# Altium PCB USB2aer_def.PCBDOC (part 3 of 3)
Units mm, origin at the board's own origin, x right, y up, seen from the top; angles counter-clockwise.
Board outline 194.75 x 143.65 mm, 2 copper layers (TopLayer, BottomLayer); 106 components, 195 nets, 863 pads, 225 vias.
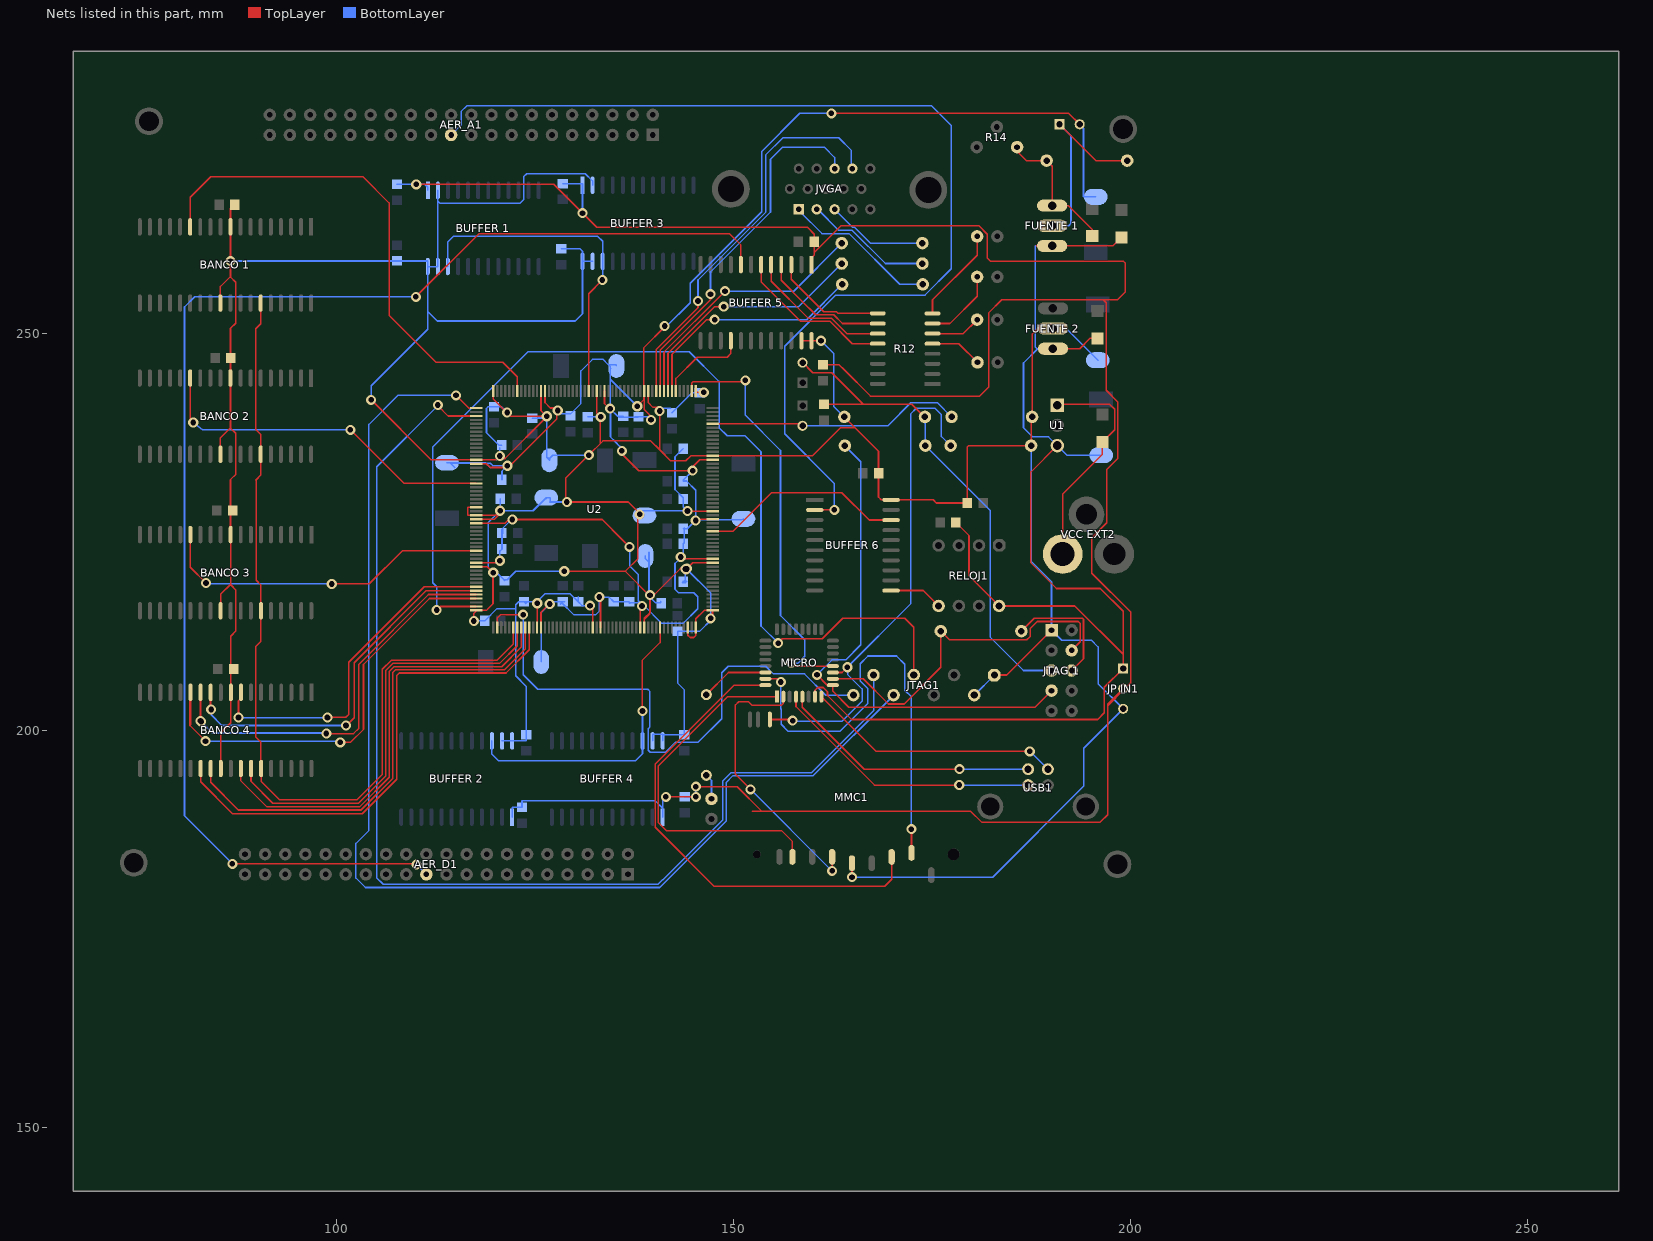
[diagram p3: the nets of this part, all layers, seen from the top]

## Via types
v1: diameter 1.27, hole 0.711, TopLayer to BottomLayer, 225 vias

## Nets (pads, with @x,y where several pads share a name; then routed paths per layer and width w, separated by ;. In a path a pad name is that pad's centre, name@x,y a point inside that pad or via, vN(x,y) a via of type N, cw(c..) or ccw(c..) an arc to the next point about the centre after c; other vN are vias at no path point) (continued)
MEM_D25: "BANCO 4.8" U2.202 | length 44.1
  TopLayer w0.203: v1(87.625,201.625) 87.625,203.725 87.931,204.031 87.931,204.797 ; v1(98.831,201.607) 98.831,201.644 v1(98.825,201.65) 98.831,201.65 101.15,201.65 101.5,202 101.5,208.575 111.041,218.116 U2.202@117.595,218.116
  BottomLayer w0.2: v1(98.825,201.65) 98.825,201.607 98.825,201.6 v1(98.831,201.607)
  BottomLayer w0.203: v1(87.625,201.625) 98.825,201.6 98.831,201.6 v1@98.85,201.6
MEM_D26: "BANCO 4.11" U2.203 | length 63.1
  TopLayer w0.203: 84.1,204.925 84.1,204.797 84.1,202.7 v1(84.175,202.625) ; v1(101.168,200.609) 101.177,200.6 101.2,200.6 102.2,201.6 102.2,208.525 111.291,217.616 U2.203@117.595,217.616
  BottomLayer w0.2: 84.175,201.975 85.525,200.625 v1(101.15,200.625) ; v1@101.15,200.6 101.159,200.609 v1(101.168,200.609)
  BottomLayer w0.203: 85.55,200.6 101.15,200.6 101.168,200.6 v1@101.2,200.6
MEM_D27: "BANCO 4.12" U2.204 | length 51.5
  TopLayer w0.203: 82.83,204.925 82.83,204.797 v1(82.83,201.195) v1(82.925,201.1) ; v1(98.704,199.604) v1(98.7,199.6) 98.704,199.6 102.125,199.6 102.8,200.275 102.8,208.35 111.566,217.116 U2.204@117.595,217.116
  BottomLayer w0.2: v1(82.83,201.195) v1(82.925,201.1) ; v1(98.7,199.6) 98.7,199.604 98.7,199.675 v1@98.704,199.671
  BottomLayer w0.203: v1(82.925,201.1) 84.35,199.675 98.7,199.675 98.704,199.675 v1@98.8,199.675 ; v1(98.704,199.604) v1@98.704,199.671
MEM_D28: "BANCO 4.25" U2.10 | length 63.8
  TopLayer w0.203: 82.851,195.197 82.851,193.526 86.877,189.5 103.225,189.5 107.575,193.85 107.575,206.925 107.878,207.228 121.328,207.228 124.245,210.145 U2.10@124.245,212.966
MEM_D29: "BANCO 4.26" U2.9 | length 61.8
  TopLayer w0.203: 84.121,195.197 84.121,193.454 87.6,189.975 103.1,189.975 103.1,189.997 107.05,193.947 107.05,207.284 107.397,207.631 121.131,207.631 123.745,210.245 ; 123.745,210.215 123.745,210.245 ; U2.9@123.745,212.966 123.745,210.245
MEM_D30: "BANCO 4.29" U2.8 | length 56.8
  TopLayer w0.203: 87.931,195.197 87.931,193.631 91.162,190.4 102.925,190.4 106.625,194.1 106.625,207.429 107.23,208.034 120.784,208.034 123.245,210.495 U2.8@123.245,212.966
MEM_D31: "BANCO 4.30" U2.7 | length 54.6
  TopLayer w0.203: 89.201,195.197 89.201,193.576 91.952,190.825 102.75,190.825 106.2,194.275 106.2,207.574 107.063,208.437 120.512,208.437 122.745,210.67 U2.7@122.745,212.966
MEM_OE: "BANCO 1.31" "BANCO 2.31" "BANCO 3.31" "BANCO 4.31" U2.6 | length 112.6
  TopLayer w0.203: 89.795,231.545 89.845,231.596 ; 90.425,253.85 90.425,251.225 89.795,250.595 89.795,237.925 90.425,237.295 90.425,234.8 90.425,232.175 89.845,231.596 ; U2.6@122.245,212.966 122.245,210.895 120.19,208.84 106.896,208.84 105.75,207.694 105.75,194.45 102.55,191.25 92.8,191.25 90.471,193.579 90.471,195.197 90.471,196.004 90.45,196.025 90.45,198.52 89.82,199.15 89.82,210.595 89.825,210.6 90.45,211.225 90.45,215.075 90.45,218.325 89.845,218.93 89.845,231.596
MEM_WE1: "BANCO 1.13" U2.150 | length 66.5
  TopLayer w0.203: 81.535,263.45 81.535,267.165 84.12,269.75 103.3,269.75 106.6,266.45 106.6,252.306 112.518,246.388 120.912,246.388 122.745,244.555 U2.150@122.745,242.766
MEM_WE2: "BANCO 2.13" U2.176 | length 44.5
  TopLayer w0.203: 81.535,244.4 81.535,239.19 v1(81.925,238.8) ; v1(101.725,237.875) 108.475,231.125 U2.176@117.586,231.125
  BottomLayer w0.203: v1(81.925,238.8) 83.1,237.875 v1(101.725,237.875)
MEM_WE3: "BANCO 3.13" U2.193 | length 58.5
  TopLayer w0.203: 81.56,224.675 81.56,220.54 v1(83.525,218.575) ; v1(99.375,218.45) 99.375,218.475 104.1,218.475 108.241,222.616 U2.193@117.595,222.616
  BottomLayer w0.2: v1(83.525,218.575) 83.635,218.465 v1(99.375,218.45) 99.375,218.475 v1@83.65,218.55
MEM_WE4: "BANCO 4.13" U2.205 | length 57.7
  TopLayer w0.203: 81.51,204.75 81.51,200.615 ; 81.581,204.797 81.581,200.686 81.51,200.615 ; v1(83.475,198.65) 81.51,200.615 ; v1(100.45,198.5) 101.75,198.5 103.375,200.125 103.375,208.3 111.691,216.616 U2.205@117.595,216.616
  BottomLayer w0.2: v1(83.475,198.65) 83.575,198.65 v1@83.6,198.625 ; v1(100.45,198.5) v1@100.45,198.6
  BottomLayer w0.203: v1@83.6,198.625 100.45,198.6 v1@100.525,198.6
"NetBUFFER 5_3": "BUFFER 5.3" R12.9 | length 14.5
  TopLayer w0.203: 157.285,258.7 157.285,256.84 161.365,252.76 162.965,252.76 163.185,252.54 R12.9@168.175,252.54
"NetBUFFER 5_4": "BUFFER 5.4" R12.10 | length 16.4
  TopLayer w0.203: 156.015,258.7 156.015,256.71 158.635,254.09 160.369,252.356 162.644,252.356 163.73,251.27 R12.10@168.175,251.27
"NetBUFFER 5_5": "BUFFER 5.5" R12.11 | length 18.3
  TopLayer w0.203: 154.745,258.7 154.745,256.605 159.397,251.953 162.322,251.953 164.275,250 R12.11@168.175,250
"NetBUFFER 5_6": "BUFFER 5.6" R12.12 | length 20.1
  TopLayer w0.203: 153.475,258.7 153.475,256.525 158.45,251.55 162.15,251.55 164.97,248.73 R12.12@168.175,248.73
"NetBUFFER 6_11": "BUFFER 6.11" RELOJ1.5 | length 6.8
  TopLayer w0.203: 169.85,217.62 173.915,217.62 RELOJ1.5@175.855,215.68
NetC6_1: "JTAG 1.5" C6.1 R4.1 R5.2 RESET1.2 | length 63.8
  TopLayer w0.203: RESET1.2@158.717,246.358 160,245.075 162.375,245.075 165.769,241.681 166.35,241.1 ; C6.1@161.4,241.1 172.475,241.1 R4.1@174.1,239.475
  BottomLayer w0.2: R4.1@174.125,239.5 174.125,238.676 174.185,238.616 R5.2@174.185,235.875 182.372,227.688 182.372,211.711 186.538,207.545 190.075,207.545
"NetC ADJ1_1": "C ADJ1.1" "FUENTE 1.1" R13.1 R14.2 | length 19.6
  TopLayer w0.203: R14.2@185.18,273.525 186.905,271.8 R13.1@189.45,271.8 190.15,271.1 190.15,266.15 ; 190.15,266.125 192.202,266.125 195.2,263.127 195.2,262.3
  BottomLayer w0.2: 188.62,266.125 190.15,266.125
NetD1_A: D1.A R3.1 | length 3.2
  BottomLayer w0.2: R3.1@146.575,194.345 147.225,193.695 D1.A@147.225,191.375
NetD2_A: D2.A R12.5 | length 6.7
  TopLayer w0.203: R12.5@175.075,248.73 178.395,248.73 D2.A@180.75,246.375
NetD3_A: D3.A R12.6 | length 6.3
  TopLayer w0.203: R12.6@175.075,250 178.95,250 D3.A@180.7,251.75
NetD4_A: D4.A R12.7 | length 9.5
  TopLayer w0.203: R12.7@175.075,251.27 177.27,251.27 180.7,254.7 D4.A@180.7,257.15
NetD5_A: D5.A R12.8 | length 12
  TopLayer w0.203: R12.8@175.075,252.54 175.075,254.25 180.7,259.875 D5.A@180.7,262.25
"NetFUENTE 1_2": "FUENTE 1.2" "VCC EXT1.1" R13.2 | length 26
  TopLayer w0.203: 191.075,276.375 195.65,271.8 R13.2@199.61,271.8
  BottomLayer w0.2: 190.15,263.585 192.227,263.585 192.532,263.89 192.532,274.918 191.075,276.375
"NetJTAG 1_4": "JTAG 1.4" MICRO.10 R2.2 | length 44.9
  TopLayer w0.203: MICRO.10@162.525,206.5 166.347,206.5 169.52,203.327 171.501,203.327 176.115,207.941 R2.2@176.115,212.5 177.211,211.404 186.944,211.404 187.376,211.836 187.376,212.827 188.265,213.716 193.446,213.716 193.704,213.458 193.704,211.174 192.615,210.085
"NetJTAG 1_6": "JTAG 1.6" R2.1 | length 15.6
  TopLayer w0.203: R2.1@186.275,212.5 187.897,214.122 193.98,214.122 194.107,213.995 194.107,209.037 192.615,207.545
"NetJTAG 1_7": "JTAG 1.7" MICRO.9 R5.1 | length 65.6
  TopLayer w0.203: v1(160.525,207) 161.825,205.7 MICRO.9@162.525,205.7 162.525,204.922 164.527,202.921 187.991,202.921 190.075,205.005
  BottomLayer w0.2: v1(160.525,207) 162.402,208.877 164.152,208.877 166.05,210.775 166.05,233.85 R5.1@164.025,235.875
NetJVGA_1: JVGA.1 R7.1 | length 19.5
  BottomLayer w0.2: JVGA.1@158.488,265.662 158.488,265.262 161.15,262.6 164.55,262.6 170.947,256.203 R7.1@173.845,256.203
NetJVGA_2: JVGA.2 R8.1 | length 16
  BottomLayer w0.2: JVGA.2@160.613,265.662 163.275,263 164.975,263 169.147,258.828 R8.1@173.795,258.828
NetJVGA_3: JVGA.3 R9.1 | length 12.8
  BottomLayer w0.2: JVGA.3@162.738,265.662 165,263.4 165.25,263.4 167.247,261.403 R9.1@173.795,261.403
NetMICRO_1: MICRO.1 MMC1.7 | length 45.5
  TopLayer w0.203: MICRO.1@155.475,204.25 149.234,204.25 140.538,195.555 140.538,188.366 141.529,187.376 156.058,187.376 157.425,186.008 MMC1.7@157.425,184.065
NetMICRO_2: MICRO.2 MMC1.5 | length 35
  TopLayer w0.203: v1(152.146,192.575) 150.241,194.48 150.241,203.2 150.647,203.606 151.892,203.606 152.324,203.175 156.05,203.175 156.275,203.399 MICRO.2@156.275,204.25 ; v1(162.425,182.296) MMC1.5@162.425,184.065
  BottomLayer w0.2: v1(152.146,192.575) v1(162.425,182.296)
NetMICRO_4: MICRO.4 USB1.3 | length 34.6
  TopLayer w0.203: MICRO.4@157.875,204.25 157.875,203 167.765,193.11 v1(178.45,193.11)
  BottomLayer w0.2: v1(178.45,193.11) USB1.3@187.12,193.11
NetMICRO_5: MICRO.5 USB1.2 | length 33
  TopLayer w0.203: MICRO.5@158.675,204.25 158.675,202.925 166.49,195.11 v1(178.475,195.11)
  BottomLayer w0.2: v1(178.475,195.11) USB1.2@187.12,195.11
NetMICRO_8: MICRO.8 USB1.1 | length 32.3
  TopLayer w0.203: MICRO.8@161.075,204.25 167.967,197.358 v1@187.372,197.358
  BottomLayer w0.203: v1@187.372,197.358 USB1.1@189.62,195.11
  other v1: 187.325,197.358
NetMICRO_11: MICRO.11 MMC1.12 R1.1 | length 64.1
  TopLayer w0.203: MMC1.12@154.575,201.375 157.3,201.375 v1(157.45,201.225) ; MICRO.11@162.525,207.3 163.678,207.3 v1(164.338,207.96)
  BottomLayer w0.2: v1@157.4,201.175 163.7,201.175 166.2,203.675 166.2,205.225 164.375,207.05 v1@164.375,208.025 ; v1(164.338,207.96) 172.314,215.936 172.314,239.878 173.025,240.589 175.387,240.589 176.2,239.776 176.2,237.025 R1.1@177.35,235.875
NetMICRO_30: MICRO.30 R3.2 | length 8.6
  TopLayer w0.203: R3.2@146.575,204.505 149.37,207.3 MICRO.30@154.025,207.3
NetMICRO_31: MICRO.31 MMC1.1 | length 56
  TopLayer w0.203: MICRO.31@154.025,206.5 155.98,206.476 v1@156.025,206.475 ; v1(172.415,187.563) 172.425,187.554 MMC1.1@172.425,184.565
  BottomLayer w0.2: v1(155.975,206.1) 155.975,202.675 155.999,202.651 155.999,200.776 156.875,199.9 163.426,199.9 166.91,203.384 166.91,205.29 165.975,206.225 165.975,208.4 166.95,209.375 170.55,209.375 171.587,208.338 171.587,205.07 172.415,204.241 v1(172.415,187.563)
NetMICRO_32: MICRO.32 MMC1.2 | length 62
  TopLayer w0.203: MICRO.32@154.025,205.7 150.074,205.7 140.132,195.758 140.132,187.782 147.549,180.365 169.062,180.365 169.925,181.228 MMC1.2@169.925,184.065
OEAERIN: "BUFFER 1.22" "BUFFER 3.22" U2.132 | length 42.8
  TopLayer w0.203: U2.132@131.745,242.766 131.745,255.02 v1(133.475,256.75)
  BottomLayer w0.2: 114.015,258.45 114.015,261.565 114.725,262.275 132.875,262.275 133.515,261.635 133.515,259.1 133.515,256.79 v1(133.475,256.75)
OEAEROUT: "BUFFER 2.22" "BUFFER 4.22" U2.43 | length 42
  TopLayer w0.203: v1(138.525,202.45) 138.525,208.86 140.745,211.08 U2.43@140.745,212.966
  BottomLayer w0.2: 119.56,198.675 119.56,196.99 120.375,196.175 137.65,196.175 138.535,197.06 138.535,198.675 ; v1(138.525,202.45) 138.525,198.685 138.535,198.675 ; v1@138.535,202.44 138.535,198.675
PROGRAM: MICRO.12 U2.106 | length 53.3
  TopLayer w0.203: U2.106@144.745,242.766 144.745,243.78 144.907,243.942 151.117,243.942 v1(151.5,244.1) ; v1(157.25,208.475) 157.625,208.1 MICRO.12@162.525,208.1
  BottomLayer w0.2: v1(151.5,244.1) 151.5,239.7 155.925,235.275 155.925,214.475 158.985,211.415 158.985,209.335 158.125,208.475 v1(157.25,208.475)
REQ_IN: "BUFFER 6.18" U2.73 | length 25.9
  TopLayer w0.203: U2.73@147.395,225.116 149.957,225.116 154.788,229.946 163.652,229.946 167.088,226.51 169.85,226.51
REQ_OUT: "BUFFER 5.16" U2.110 | length 11.4
  TopLayer w0.203: U2.110@142.745,242.766 142.745,244.345 145.425,247.025 149.2,247.025 149.665,247.49 149.665,249.1
REQI: "BUFFER 6.2" AER_A1.21 | length 135.4
  TopLayer w0.203: 160.25,227.78 162.705,227.78 v1(162.712,227.787)
  BottomLayer w0.2: AER_A1.21@114.425,275.025 115.675,276.275 115.675,277.975 116.425,278.725 174.95,278.725 177.45,276.225 177.45,258.175 174.125,254.85 162.884,254.85 156.45,248.416 156.45,237.375 162.675,231.15 162.675,227.787 v1(162.712,227.787)
REQO: "BUFFER 5.8" AER_D1.21 | length 174.6
  TopLayer w0.203: v1@86.9,183.175 v1@109.985,183.175 ; v1(109.975,254.625) 117.942,262.592 149.508,262.592 150.935,261.165 150.935,258.7
  BottomLayer w0.2: v1@86.9,183.175 80.825,189.25 80.825,253.35 82.1,254.625 v1(109.975,254.625)
  BottomLayer w0.203: v1@109.985,183.175 AER_D1.21@111.3,181.86
  other v1: 110.075,183.1 86.85,183.175
RESET: "RESET FPGA1.2" R6.1 U2.100 | length 32.2
  TopLayer w0.203: U2.100@147.395,238.616 158.581,238.616 158.8,238.835
  BottomLayer w0.2: 158.7,238.385 169.46,238.385 172.35,241.275 175.7,241.275 R6.1@177.475,239.5
TCK: JTAG1.7 U2.207 | length 130.8
  TopLayer w0.203: v1(112.598,215.163) 113.051,215.616 U2.207@117.595,215.616 ; v1(155.625,211) 156.156,211.531 161.181,211.531 163.775,214.125 171.575,214.125 172.715,212.985 JTAG1.7@172.715,206.975
  BottomLayer w0.2: v1(112.598,215.163) 112.598,218.11 112.09,218.618 112.09,235.712 124.104,247.726 144.424,247.726 148.184,243.966 148.184,238.15 149.2,237.134 151.435,237.134 153.467,235.102 153.467,213.158 v1(155.625,211)
TDI: JTAG1.15 U2.159 | length 147.5
  TopLayer w0.203: v1@112.725,240.925 114.034,239.616 U2.159@117.595,239.616
  BottomLayer w0.2: v1@112.725,240.925 112.75,240.925 105.05,233.225 105.05,181.833 105.028,181.811 105.028,181.447 105.875,180.6 140.475,180.6 141.047,181.172 141.109,181.172 148.65,188.713 148.65,193.625 149.684,194.659 159.834,194.659 167.65,202.476 167.65,206.95 JTAG1.15@167.635,206.975
  other v1: 112.75,241
TDO: JTAG1.13 U2.157 | length 154.8
  TopLayer w0.203: v1@115.05,242.25 v1(115.038,242.214) 116.637,240.616 U2.157@117.595,240.616
  BottomLayer w0.2: v1(115.038,242.214) 115.05,242.25 115.038,242.25 107.764,242.25 104.057,238.544 104.057,187.382 102.425,185.75 102.425,181.4 103.625,180.2 140.703,180.2 149.073,188.57 149.073,193.446 149.885,194.259 159.999,194.259 JTAG1.13@170.175,204.435
TMS: JTAG1.19 U2.2 | length 71.9
  TopLayer w0.203: U2.2@120.245,212.966 120.245,214.173 120.651,214.579 v1(123.495,214.579)
  BottomLayer w0.2: v1(123.495,214.579) 123.495,207.01 125.324,205.181 139.192,205.181 139.471,204.902 139.471,200.431 139.243,200.203 139.243,197.51 139.497,197.256 141.427,197.256 142.697,198.526 145.567,198.526 148.514,201.473 148.514,207.264 149.327,208.077 154.076,208.077 155.042,207.112 158.948,207.112 161.625,204.435 JTAG1.19@165.095,204.435
VCC_2.5V: "VCC EXT1.2" C2G1.1 C2G2.1 C2G3.1 C2G4.1 C2P1.1 C2P2.1 C2P3.1 C2P4.1 C2P5.1 C2P6.1 C2P7.1 C2P8.1 C2P9.1 C2P10.1 C2P11.1 C2P12.1 C67.1 U2.13 U2.28 U2.38 U2.66 U2.76 U2.91 U2.118 U2.128 U2.143 U2.171 U2.186 U2.196 | length 320.7
  TopLayer w0.2: U2.196@117.595,221.116 120.291,221.116 v1(120.55,221.375) ; U2.186@117.595,226.116 121.216,226.116 121.675,226.575 v1(122.125,226.575) 133.45,226.575 135.925,224.1 v1(136.9,223.125) ; U2.171@117.595,233.616 118.86,233.616 ; v1(121.5,233.35) 121.825,233.35 127.725,239.25 127.725,240.3 v1@127.725,240.625 ; U2.13@125.745,212.966 125.745,214.87 126.825,215.95 127,216.125 v1@127.05,216.125 ; U2.143@126.245,242.766 126.245,241.305 126.925,240.625 v1@127.725,240.625 ; v1@127.8,240.625 v1@127.725,240.625 ; v1(133.1,216.8) 133.245,216.655 U2.28@133.245,212.966 ; U2.128@133.745,242.766 133.745,241.18 134.375,240.55 v1(134.45,240.55) ; v1@135.7,235.1 135.75,235.05 135.8,235 138.075,232.725 v1(144.85,232.725) 144.85,233.225 145.741,234.116 U2.91@147.395,234.116 ; U2.38@138.245,212.966 138.245,215.265 138.245,215.283 138.245,215.675 138.245,215.755 138.251,215.761 138.32,215.83 138.49,216 138.475,216 v1@138.35,216 ; U2.118@138.745,242.766 138.745,240.43 139.6,239.575 139.641,239.534 v1@139.6,239.534 ; v1(143.35,221.85) 143.457,221.85 143.463,221.844 143.691,221.616 U2.66@147.395,221.616 ; v1(145.225,226.45) 145.275,226.45 145.441,226.616 U2.76@147.395,226.616
  TopLayer w0.203: 118.86,233.616 119.355,233.121 v1@121.5,233.121 ; v1@122.527,226.568 131.928,226.568 ; v1@135.7,235.1 v1@135.7,235.204 ; v1(137.871,240.843) 138.709,241.681 138.709,242.766 138.709,248.234 v1@141.325,250.85 ; v1@138.245,215.265 138.236,215.274 138.245,215.283 138.32,215.358 138.32,215.675 v1@138.32,215.83 ; v1@139.6,239.534 v1@139.6,239.575 ; v1@162.35,277.775 192.215,277.775 193.615,276.375
  BottomLayer w0.2: C2G2.1@113.9,233.725 118.751,233.725 118.801,233.675 ; C2G2.1@114.879,233.121 114.325,233.675 118.801,233.675 ; 119.355,233.121 118.801,233.675 ; v1(120.55,221.375) 120.55,222.575 C2P10.1@120.825,222.85 C2P11.1@120.825,224.7 ; C2P11.1@120.825,224.875 120.825,225.35 C2P11.1@120.9,225.425 ; C2P12.1@120.825,231.6 120.825,232.675 v1(121.5,233.35) 119.675,233.35 119.629,233.396 119.35,233.675 118.801,233.675 ; v1@122.329,226.371 v1@122.527,226.568 ; C2G1.1@125.75,208.625 125.75,214.825 v1(126.85,215.925) v1@127.05,215.925 ; v1@127.05,216.125 127.125,216.2 C2P9.1@128.25,216.2 ; v1@127.8,240.625 127.988,240.438 v1@128.244,240.181 ; v1@127.94,239.878 129.45,239.878 129.462,239.878 130.775,241.191 130.775,245.3 132.223,246.748 132.225,246.75 133.55,246.75 C2G3.1@134.25,246.05 ; C2P9.1@128.2,215.925 C2P9.1@128.363,216.088 ; C2P9.1@128.7,216.2 C2P9.1@128.475,216.2 ; v1@134.5,240.525 v1@134.5,240.5 ; C2G3.1@134.525,245.625 C2G3.1@134.456,245.556 ; C2G3.1@135.245,245.925 135.245,246.05 C2G3.1@134.25,246.05 ; v1@135.7,235.1 135.7,235.225 v1@135.7,235.75 ; C2P2.1@136.1,239.575 135.425,239.575 ; v1@136.125,235.325 136.075,235.375 v1@135.7,235.75 ; C2P7.1@136.85,216.2 C2P8.1@134.9,216.2 134.3,216.8 v1(133.1,216.8) 133.1,215.05 132.6,214.55 129.9,214.55 C2P9.1@128.363,216.088 ; v1(136.9,223.125) 136.9,220.75 137.998,219.652 ; C2P7.1@136.984,216 136.925,216 136.85,216.075 v1@138.075,216.075 ; v1(137.871,240.843) 134.456,244.258 C2G3.1@134.456,245.556 ; C2P3.1@137.975,239.475 C2P3.1@137.516,239.475 ; 138,216.525 138,219.65 137.998,219.652 ; C2P3.1@138.025,239.525 139.2,239.525 v1(139.6,239.125) ; v1@138.245,215.265 138.475,215.495 v1(138.475,215.675) ; v1@138.475,216 v1@138.35,216 ; v1@138.5,216.025 138.5,215.85 v1@138.35,216 ; v1@139.641,239.534 139.6,239.534 138.025,239.534 137.575,239.534 C2P3.1@137.516,239.475 ; v1@141.325,250.85 141.5,250.85 144.542,253.892 144.542,256.333 153.55,265.341 153.55,272.95 158.35,277.75 v1(162.325,277.75) ; v1(143.35,221.85) 143.416,221.916 v1@143.65,222.15 ; C2P5.1@143.65,225.4 C2P5.1@143.775,225.4 ; C2P4.1@143.65,231.4 C2P4.1@143.65,231.425 ; C2P5.1@143.775,225.55 C2P5.1@143.775,225.4 ; v1(144.85,232.725) 143.65,231.525 C2P4.1@143.65,231.425 ; v1(145.225,226.45) 145.088,226.313 v1@144.925,226.15 ; C2G4.1@151.25,226.65 151.15,226.55 v1@145.25,226.55 ; 193.615,276.375 194.107,275.883 194.107,267.225 C67.1@195.65,267.225 ; C2P11.1@120.825,224.7 120.9,224.775 120.9,224.875 C2P11.1@120.9,224.941 ; C2P11.1@120.825,224.7 120.825,224.866 120.829,224.871 C2P11.1@120.9,224.941 ; C2P11.1@120.9,224.941 C2P11.1@120.9,225.425 ; C2P11.1@120.9,225.425 121.975,226.5 C2P11.1@120.9,225.425 ; C2P9.1@128.25,216.2 C2P9.1@128.363,216.088 ; C2P9.1@128.25,216.2 C2P9.1@128.475,216.2 ; C2P9.1@128.363,216.088 C2P9.1@128.475,216.2 ; C2G3.1@134.25,246.05 134.456,245.844 C2G3.1@134.456,245.556 ; C2G3.1@134.456,245.556 134.45,245.55 v1(134.45,240.55) v1@134.5,240.5 ; v1@134.5,240.5 135.425,239.575 ; v1@134.5,240.5 134.5,236.975 135.103,236.372 ; 135.103,236.372 135.7,235.775 v1@135.7,235.75 ; 135.103,236.372 135.103,236.347 v1@135.7,235.75 ; 135.425,239.575 135.525,239.475 136.1,239.475 C2P3.1@137.516,239.475 ; 137.998,219.652 137.998,216.352 v1@138.275,216.075 ; v1@138.075,216.075 v1@138.15,216 ; v1@138.075,216.075 v1@138.275,216.075 ; v1@138.15,216 v1@138.35,216 ; v1@138.15,216 v1(138.475,215.675) ; v1@138.275,216.075 v1@138.35,216 ; v1(138.475,215.675) 138.775,215.675 140.975,213.475 143.65,213.475 145.5,215.325 145.5,216.825 144.975,217.35 143.075,217.35 142.625,217.8 142.625,221.025 143.4,221.8 143.65,222.05 v1@143.65,222.15 ; v1@143.65,222.15 C2P6.1@143.65,223.525 143.65,223.575 143.775,223.575 C2P5.1@143.775,225.4 ; C2P4.1@143.65,231.425 144.075,231.425 145.25,230.25 v1@145.25,226.55 ; C2P5.1@143.775,225.4 144.175,225.4 v1@144.925,226.15 ; v1@144.925,226.15 145.225,226.15 145.25,226.15 145.25,226.45 v1@145.25,226.55
  other v1: 135.925,235.225 127.85,240.3 141.325,250.95
VCC_3.3V: "BANCO 1.9" "BANCO 1.27" "BANCO 2.9" "BANCO 2.27" "BANCO 3.9" "BANCO 3.27" "BANCO 4.9" "BANCO 4.27" "BUFFER 1.2" "BUFFER 1.23" "BUFFER 1.24" "BUFFER 2.23" "BUFFER 2.24" "BUFFER 3.2" "BUFFER 3.23" "BUFFER 3.24" "BUFFER 4.23" "BUFFER 4.24" "BUFFER 5.23" "BUFFER 5.24" "BUFFER 6.20" "FUENTE 2.2" "JP IN1.3" "JTAG 1.1" C3G1.1 C3G2.1 C3G3.1 C3G4.1 C3P1.1 C3P2.1 C3P3.1 C3P4.1 C3P5.1 C3P6.1 C3P7.1 C3P8.1 C3P9.1 C3P10.1 C3P11.1 C3P12.1 C3P13.1 C3P14.1 C3P15.1 C3P16.1 C54.1 C55.1 C56.1 C57.1 C58.1 C59.1 C60.1 C61.1 C62.1 C63.1 C68.1 JTAG1.1 JTAG1.2 MMC1.4 R1.2 R4.2 R6.2 U2.12 U2.26 U2.39 U2.50 U2.52 U2.53 U2.65 U2.78 U2.92 U2.105 U2.117 U2.130 U2.144 U2.156 U2.170 U2.182 U2.184 U2.185 U2.197 U2.208 | length 749
  TopLayer w0.2: v1(117.275,213.775) 117.275,214.725 117.595,215.045 U2.208@117.595,215.116 118.866,215.116 119.11,215.36 119.699,215.949 119.699,219.875 v1@119.699,219.901 ; U2.197@117.595,220.616 118.984,220.616 v1@119.699,219.901 ; U2.170@117.595,234.116 120.123,234.1 120.125,234.1 ; U2.184@117.641,227.116 120.041,227.116 v1(120.6,227.675) ; v1(119.725,219.875) v1@119.699,219.901 ; U2.156@119.745,242.766 119.745,241.73 121.45,240.025 121.475,240 121.9,239.575 126.4,239.575 126.402,239.563 v1@126.416,239.471 ; v1@120.225,234.55 v1@120.556,234.55 ; U2.12@125.245,212.966 125.245,215.77 125.387,215.912 v1@125.45,215.975 ; 125.745,240.83 U2.144@125.745,242.766 ; v1@126.425,239.471 126.425,239.573 v1@126.425,239.6 ; v1@126.65,239.825 v1@126.65,239.925 ; v1@128.875,228.85 128.875,231.8 v1@131.762,234.688 ; v1@131.775,234.7 133.55,236.475 139.575,236.475 140.7,235.35 ; v1(131.925,215.725) 132.245,215.405 U2.26@132.245,212.966 ; 133.225,236.15 v1@133.225,239.451 ; U2.39@138.745,212.966 138.745,214.12 139.475,214.85 139.475,216.6 v1@139.575,216.7 ; U2.117@139.245,242.766 139.245,241.305 139.85,240.7 v1@140.65,240.7 ; v1@139.425,217.05 139.975,217.05 143.325,220.4 v1@143.775,220.4 ; v1@139.45,217.225 v1@139.45,217.425 ; v1@139.475,217.2 v1@139.6,217.2 ; 140.823,235.227 142.075,233.975 144,233.975 ; v1(144.125,220.375) 144.134,220.384 144.261,220.511 144.866,221.116 U2.65@147.395,221.116 ; v1@144.382,227.65 144.416,227.616 U2.78@147.395,227.616 ; 145.366,234.616 U2.92@147.395,234.616 ; v1@147.244,213.994 147.325,214.075 147.325,215.046 U2.53@147.395,215.116
  TopLayer w0.203: 85.345,234.8 85.345,236.88 86.615,238.15 ; 85.345,253.85 85.345,255.93 86.615,257.2 ; 85.37,215.075 85.37,217.155 86.64,218.425 ; 85.391,195.197 85.391,199.691 86.661,200.961 86.661,204.797 86.661,205.604 86.64,205.625 C63.1@86.64,207.725 ; v1(86.614,259.131) v1(86.614,259.131) 86.615,263.45 86.615,265.765 87.1,266.25 C60.1@87.175,266.25 ; 86.615,225.35 86.615,225.374 ; v1(86.614,259.131) 86.615,257.2 ; C61.1@86.675,246.925 C61.1@86.615,246.925 ; C62.1@86.875,227.7 C62.1@86.615,227.7 ; C63.1@87,207.725 C63.1@86.64,207.725 ; v1(104.343,241.656) 111.883,234.116 U2.170@117.595,234.116 119.867,234.116 ; U2.185@117.595,226.616 119.87,226.616 120.765,227.51 v1@120.904,227.65 ; U2.182@117.595,228.116 116.51,228.116 116.51,227.116 U2.184@117.595,227.116 U2.184@117.641,227.116 ; v1@120.188,234.437 v1@120.218,234.467 ; v1@120.218,234.264 120.556,234.264 121.209,234.264 v1@126.416,239.471 ; v1@120.225,234.4 v1@120.225,234.55 ; v1(121.475,240.05) 121.475,240 121.9,239.575 ; v1@125.1,216.2 v1(125.275,216.025) v1@125.388,215.912 ; U2.144@125.745,242.766 125.745,240.294 126.457,239.582 v1(126.467,239.573) ; v1@128.675,220.075 136.4,220.075 137.922,221.597 137.922,227.584 136.731,228.775 v1(129,228.775) ; v1@128.875,228.85 v1@129,228.85 ; U2.130@132.745,242.766 132.745,240.03 v1@133.274,239.501 ; 136.315,220.075 v1@139.407,216.982 ; 138.745,214.005 139.446,214.706 v1@139.446,217.05 ; v1@139.35,216.925 139.45,217.025 139.45,217.225 139.475,217.2 v1@139.475,216.6 ; v1@139.475,217.199 v1@139.476,217.2 ; v1(140.7,240.25) 140.7,235.35 140.823,235.227 ; 142.178,219.253 v1@143.325,220.4 ; 143.27,220.345 v1(143.942,220.345) ; 144,233.975 144.641,234.616 159.966,234.616 163.461,238.111 165.354,238.111 ; v1(144.094,220.345) 144.865,221.116 U2.65@147.395,221.116 ; v1(144.2,227.65) v1@144.382,227.65 ; U2.50@144.245,212.966 144.245,211.983 144.525,211.703 144.998,211.703 145.245,211.95 U2.52@145.245,212.966 145.245,214.057 146.304,215.116 U2.53@147.395,215.116 147.395,214.4 v1(147.117,214.122) ; U2.105@145.245,242.766 145.245,242.697 145.342,242.6 v1(146.25,242.6) ; 158.555,249.1 159.825,249.1 159.825,249.098 v1(161.025,249.098) ; R4.2@163.965,239.5 168.275,235.19 C55.1@168.275,232.4 168.275,229.406 168.631,229.05 169.85,229.05 175.165,229.05 175.565,228.65 C59.1@179.475,228.65 179.475,235.712 179.638,235.875 R1.2@187.51,235.875 187.51,239.5 R6.2@187.635,239.5 187.635,249.941 188.329,250.635 190.25,250.635 ; v1(164.925,181.508) MMC1.4@164.925,183.265 ; JTAG1.1@182.875,206.975 184.425,206.975 190.075,212.625 ; 86.615,225.374 C62.1@86.615,227.7 ; 86.615,225.374 86.64,225.374 86.64,224.675 86.64,218.425 ; C62.1@86.615,227.7 86.615,231.605 87.265,232.255 87.265,237.425 86.615,238.075 86.615,238.15 ; 86.615,238.15 86.615,244.4 C61.1@86.615,246.925 ; C61.1@86.615,246.925 86.615,250.655 87.265,251.305 87.265,256.475 86.615,257.125 86.615,257.2 ; C63.1@86.64,207.725 86.64,211.88 87.29,212.53 87.29,217.7 86.64,218.35 86.64,218.425
  BottomLayer w0.2: v1(86.614,259.131) 86.633,259.15 C57.1@107.6,259.15 111.475,259.15 111.475,258.45 111.475,258.445 ; v1(104.343,241.656) 104.343,243.414 111.475,250.546 111.475,252.781 ; 112.745,268.05 112.745,266.68 ; v1(117.275,213.775) 117.225,213.825 C3P14.1@118.675,213.825 120.2,215.35 122.555,215.35 ; v1(119.725,219.875) 120.175,219.875 C3P13.1@121.074,218.976 ; 120.123,234.1 120.125,234.1 120.286,234.281 120.318,234.316 120.349,234.35 120.548,234.573 v1@120.55,234.575 ; C3P16.1@120.55,235.625 120.55,234.575 v1(120.556,234.569) ; v1@120.575,227.65 120.6,227.65 124.8,227.65 C3G1.1@126.375,229.225 ; v1(120.6,227.675) v1@120.6,228.167 ; C3P15.1@120.6,229.2 v1@120.6,228.167 ; C3P16.1@120.775,235.95 120.421,235.95 118.872,237.499 118.872,240.572 119.075,240.775 C3P1.1@119.825,240.775 120.75,240.775 v1(121.475,240.05) ; 120.83,198.675 120.83,198.679 122.1,198.679 122.1,198.675 123.9,198.675 C58.1@123.9,199.45 123.9,205.538 122.555,206.883 122.555,215.819 122.936,216.2 C3P12.1@123.6,216.2 ; v1@120.846,227.921 v1@120.6,228.167 ; v1@120.846,227.921 121.011,227.757 121.107,227.66 124.691,227.66 126.365,229.334 C3G1.1@126.399,229.334 126.898,229.334 C3G1.1@126.898,228.775 ; C3P13.1@121.125,218.925 C3P13.1@121.074,218.976 ; C3P13.1@121.15,218.85 121.15,218.923 C3P13.1@121.097,218.976 ; C3P2.1@124.65,239.35 125.325,239.35 ; v1@125.1,215.975 v1@125.275,215.975 ; v1@125.1,216.2 C3P12.1@124.05,216.2 ; v1(125.275,216.025) 125.275,216.25 126.22,217.195 ; v1@126.416,239.471 v1@126.296,239.471 ; v1(126.467,239.573) 126.467,238.557 126.475,238.548 ; v1(126.475,239.6) 126.475,239.573 126.475,238.548 ; v1@126.65,239.925 126.65,239.825 126.477,239.652 126.45,239.625 126.432,239.607 v1@126.296,239.471 ; C3G2.1@126.813,234.037 C3G2.1@126.825,234.025 ; C3G2.1@126.813,234.038 126.725,234.125 C3G2.1@126.475,234.375 ; C3G1.1@126.875,228.775 C3G1.1@126.898,228.775 ; C56.1@128.275,260.7 130.658,260.7 130.975,260.383 130.975,259.1 ; v1(128.675,220.05) 122.575,220.05 121.501,218.976 121.15,218.976 C3P13.1@121.097,218.976 ; v1@128.7,220.125 v1@128.7,220.15 ; v1(129,228.775) C3G1.1@126.898,228.775 ; 130.425,216.818 C3P11.1@130.425,216.2 ; C3P3.1@131.625,239.525 132,239.525 132.025,239.5 v1(133.275,239.5) ; v1(131.775,234.675) 127.225,234.675 126.85,234.3 126.85,234.125 126.6,234.375 C3G2.1@126.475,234.375 ; v1(131.925,215.725) 130.9,215.725 C3P11.1@130.425,216.2 ; 132.245,259.1 130.975,259.1 ; 132.245,268.7 132.245,269.227 131.318,270.154 123.952,270.154 123.546,269.748 123.546,266.852 123.139,266.446 112.979,266.446 112.745,266.68 ; C3G3.1@138.775,227.075 138.278,227.075 138.278,227.525 138.3,227.525 138.312,227.537 138.425,227.65 138.775,227.65 v1@143.725,227.65 ; C3G4.1@138.9,221.975 138.9,221.64 C3G4.1@139.35,221.19 ; C3G4.1@139.35,222.425 139.35,221.975 C3G4.1@139.35,221.19 ; v1(139.475,217.05) v1@139.35,216.925 ; v1@139.575,216.7 140.106,217.231 ; 139.805,198.675 139.805,199.492 141.075,199.492 141.075,199.466 ; v1(140.7,240.25) 140.775,240.325 140.775,240.575 C3P4.1@142.075,240.575 ; C3P9.1@140.85,216.25 140.85,216.1 140.175,216.1 v1@139.35,216.925 ; 141.075,198.675 141.075,199.466 ; C3P4.1@142.25,240.025 144.75,242.525 C3P5.1@145.75,242.525 ; C3P6.1@143.55,235.4 142.625,234.475 142.625,230.35 143.675,229.3 143.675,229.15 143.675,228.175 144.138,227.713 v1(144.2,227.65) ; C3P8.1@143.65,218.725 143.65,218.75 143.625,218.775 143.65,218.775 C3P8.1@143.725,218.775 ; C3P6.1@143.655,235.486 C3P6.1@143.66,235.486 ; v1@143.9,227.475 v1@143.725,227.65 ; v1(143.942,220.345) 143.942,218.992 C3P8.1@143.725,218.775 ; v1(144.025,220.3) 144.025,219.95 144.125,219.85 v1(144.125,220.375) ; v1(144.094,220.345) 144.125,220.314 147.117,217.322 v1(147.117,214.122) ; C3P8.1@144.125,218.8 C3P8.1@144.1,218.775 ; v1@144.382,227.65 v1(144.2,227.65) ; v1@147.325,214.075 147.244,213.994 145.725,212.475 C3P10.1@142.95,212.475 142.95,205.969 143.775,205.144 C54.1@143.775,199.45 142.621,199.45 142.605,199.466 141.075,199.466 ; v1(161.025,249.098) 162.611,247.512 162.611,240.854 R4.2@163.965,239.5 ; v1(164.925,181.508) 182.651,181.508 194.132,192.989 194.132,197.752 199.1,202.72 195.936,205.884 195.936,210.515 195.097,211.353 191.347,211.353 190.075,212.625 190.075,218.713 187.51,221.278 R1.2@187.51,235.875 ; JTAG1.2@180.335,204.435 JTAG1.1@182.875,206.975 ; 190.25,250.635 191.915,250.635 C68.1@195.925,246.625 ; 111.475,252.781 111.475,258.445 ; 111.475,252.781 112.669,251.587 130.048,251.587 130.975,252.514 130.975,259.1 ; 111.475,258.445 112.745,258.445 112.745,258.45 112.745,266.68 ; C3P13.1@121.074,218.976 C3P13.1@121.097,218.976 ; C3P12.1@123.6,216.2 C3P12.1@124.05,216.2 ; C3P12.1@123.6,216.2 123.825,215.975 C3P12.1@124.05,216.2 ; 125.325,239.35 125.446,239.471 v1@126.296,239.471 ; 125.325,239.35 126.175,239.35 v1@126.296,239.471 ; 126.22,217.195 129.43,217.195 ; 126.22,217.195 126.225,217.2 129.425,217.2 129.43,217.195 ; C3G2.1@126.475,234.375 126.475,238.548 ; 129.43,217.195 C3P11.1@130.425,216.2 ; v1@139.35,216.925 C3G4.1@139.35,221.19 ; C3P8.1@143.725,218.775 C3P8.1@144.1,218.775 ; C3P8.1@143.725,218.775 143.663,218.712 143.575,218.625 143.65,218.625 143.95,218.625 C3P8.1@144.1,218.775 ; v1@143.725,227.65 v1(144.2,227.65)
  BottomLayer w0.203: v1(119.725,219.875) 119.075,220.525 119.075,226.15 120.575,227.65 v1(120.6,227.675)
  other v1: 138.175,227.225
VCC_5V: "FUENTE 1.3" "FUENTE 2.3" "JP IN1.1" C64.1 C65.1 C66.1 C70.1 MICRO.7 RELOJ1.8 U1.2 | length 171.1
  TopLayer w0.203: MICRO.7@160.275,204.25 160.275,205.075 160.6,205.4 161.325,205.4 161.85,204.875 161.85,204.4 164.879,201.371 195.885,201.371 196.723,202.209 196.723,205.423 199.1,207.8 199.1,209.579 ; C64.1@178.025,226.2 179.675,224.55 179.675,219.48 RELOJ1.8@183.475,215.68 192.999,215.68 199.1,209.579 ; 188.163,261.045 190.15,261.045 197.795,261.045 C65.1@198.875,262.125 ; 190.25,248.095 193.624,248.095 194.929,249.4 C66.1@195.875,249.4 ; U1.2@190.8,235.885 187.475,232.56 187.475,221.103 190.703,217.875 196.225,217.875 199.1,215 199.1,209.579
  BottomLayer w0.2: 188.329,248.095 186.538,246.304 186.538,238.15 187.706,236.982 189.703,236.982 192.01,234.675 C70.1@196.325,234.675 ; 190.15,261.045 188.036,261.045 188.036,248.31 188.252,248.095 190.25,248.095
VCC_AER: "BUFFER 1.1" "BUFFER 2.1" "BUFFER 3.1" "BUFFER 4.1" "BUFFER 5.1" "JP IN1.2" C48.1 C49.1 C50.1 C51.1 C52.1 C53.1 | length 324.2
  TopLayer w0.203: v1(110.025,268.8) 127.351,268.8 132.753,263.398 159.311,263.398 160.175,262.534 C48.1@160.175,261.575 160.175,259.913 159.977,259.715 ; v1(141.478,191.618) v1(145.263,191.618) ; v1(145.263,192.913) 150.47,192.913 153.594,189.789 ; 152.375,189.789 179.911,189.789 181.257,188.443 196.215,188.443 197.155,189.382 197.155,203.315 199.1,205.26 ; 160.175,260.217 163.533,263.576 180.924,263.576 181.966,262.534 181.966,259.512 182.372,259.105 199.136,259.105 199.339,258.902 199.339,255.219 198.374,254.254 183.792,254.254 182.143,252.605 182.143,243.243 181.025,242.125 167.25,242.125 163.94,245.435 163.322,246.053 C51.1@161.277,246.053 ; 196.596,254.254 196.952,253.898 196.952,242.848 198.425,241.375 198.425,234.264 197.028,232.867 197.028,226.169 195.148,224.29 195.148,219.812 200.05,214.909 200.05,205.994 199.208,205.152 197.155,203.098
  BottomLayer w0.2: C49.1@107.6,268.825 111.077,268.825 111.475,268.427 111.475,268.05 ; 122.1,189.075 122.1,190.3 C52.1@123.35,190.3 123.35,191.11 140.161,191.11 141.075,190.195 ; C50.1@128.475,268.9 130.975,268.9 130.975,268.7 v1(130.975,265.176) ; 141.075,189.075 141.075,191.215 v1(141.478,191.618) ; C53.1@143.85,191.625 v1@145.255,191.625 ; v1@144.678,191.625 145.263,192.209 v1(145.263,192.913)
VCC_ALIM: "VCC EXT2.1" C69.1 U1.1 | length 28.3
  TopLayer w0.203: U1.1@190.925,241.075 197.425,241.075 198.022,240.478 198.022,237.897 C69.1@196.475,236.35 196.475,234.775 191.475,229.775 191.475,222.225
VGA_BLUE: R9.2 U2.113 | length 33
  TopLayer w0.203: U2.113@141.245,242.766 141.245,247.67 v1(148.925,255.35)
  BottomLayer w0.2: v1(148.925,255.35) 157.582,255.35 R9.2@163.635,261.403
VGA_GREEN: R8.2 U2.112 | length 31.3
  TopLayer w0.203: U2.112@141.745,242.766 141.745,247.52 147.625,253.4 v1(148.775,253.4)
  BottomLayer w0.2: v1(148.775,253.4) 158.207,253.4 R8.2@163.635,258.828
VGA_HSYNC: JVGA.13 U2.114 | length 45.8
  TopLayer w0.203: U2.114@140.745,242.766 140.745,247.895 147.1,254.25 v1(147.1,254.975)
  BottomLayer w0.2: v1@147.025,255.05 v1@147.025,255.2 ; v1(147.1,254.975) 147.1,257.759 154.665,265.324 154.665,271.965 156.2,273.5 161.438,273.5 162.738,272.2 JVGA.13@162.738,270.788
VGA_RED: R7.2 U2.111 | length 29.7
  TopLayer w0.203: U2.111@142.245,242.766 142.245,247.395 146.6,251.75 v1(147.625,251.75)
  BottomLayer w0.2: v1(147.625,251.75) 159.219,251.75 R7.2@163.672,256.203
VGA_VSYNC: JVGA.14 U2.115 | length 50.1
  TopLayer w0.203: U2.115@140.245,242.766 140.245,247.97 145.525,253.25 v1(145.525,254.1)
  BottomLayer w0.2: v1(145.525,254.1) 145.525,256.75 154.046,265.271 154.046,272.496 156.225,274.675 163.25,274.675 164.863,273.062 JVGA.14@164.863,270.788
pads on no net: "BANCO 1.19" "BANCO 1.36" "BANCO 2.19" "BANCO 2.36" "BANCO 3.19" "BANCO 3.36" "BANCO 4.19" "BANCO 4.36" "BUFFER 5.9" "BUFFER 5.10" "BUFFER 5.14" "BUFFER 5.15" "BUFFER 6.3" "BUFFER 6.5" "BUFFER 6.7" "BUFFER 6.12" "BUFFER 6.14" "JTAG 1.8" "JTAG 1.10" "VCC EXT2.3" AER_A1.1 AER_A1.20 AER_A1.23 AER_A1.25 AER_A1.27 AER_A1.28 AER_A1.31 AER_A1.32 AER_A1.33 AER_A1.34 AER_A1.35 AER_A1.36 AER_A1.37 AER_A1.38 AER_A1.39 AER_D1.1 AER_D1.20 AER_D1.23 AER_D1.25 AER_D1.27 AER_D1.28 AER_D1.31 AER_D1.32 AER_D1.33 AER_D1.34 AER_D1.35 AER_D1.36 AER_D1.37 AER_D1.38 AER_D1.39 JVGA.4 JVGA.9 JVGA.11 JVGA.12 JVGA.15 JVGA.16 JVGA.17 MICRO.6 MMC1.0 MMC1.8 MMC1.9 MMC1.11 R12.1 R12.2 R12.3 R12.4 R12.13 R12.14 R12.15 R12.16 RELOJ1.1 RELOJ1.2 RELOJ1.3 RELOJ1.6 RELOJ1.7 U2.49 U2.55 U2.56 U2.69 U2.70 U2.71 U2.74 U2.75 U2.81 U2.82 U2.83 U2.84 U2.86 U2.87 U2.88 U2.89 U2.90 U2.94 U2.95 U2.96 U2.97 U2.98 U2.99 U2.119 U2.187
copper on no net: | length 0.2
  TopLayer w0.203: 106.22,181.86 106.241,181.839 ; 108.739,181.839 108.76,181.86 108.764,181.864
  BottomLayer w0.2: 143.65,233.975 143.655,233.98 ; 174.55,268.1 174.65,268.1

## Keep-outs
KeepOutLayer:
  lines w0.254: 71.325,279.75 201.9,279.6 ; 71.425,180.15 71.5,279.75 ; 71.55,179.325 202.125,179.325 ; 201.9,279.75 202.05,179.875

## Text inside footprints (layer, text, board x,y; h text height)
JVGA: TopOverlay "1" at 157.05,265.225 h1.5; TopOverlay "5" at 167.675,266.538 h1.5; TopOverlay "11" at 156.675,272.975 h1.5
U1: TopOverlay "1" at 187.125,241.215 h1.5 r270; TopOverlay "2" at 187.125,236.385 h1.5 r270; TopOverlay "3" at 187.125,238.925 h1.5 r270